# Altium PCB pulse_oximeter.PcbDoc
Units mm, origin at the board's own origin, x right, y up, seen from the top; angles counter-clockwise.
Board outline 15.4 x 10.4 mm, 2 copper layers (Top Layer, Bottom Layer); 37 components, 39 nets, 156 pads, 0 vias.
Unrouted connection lines stored in the file: 77.
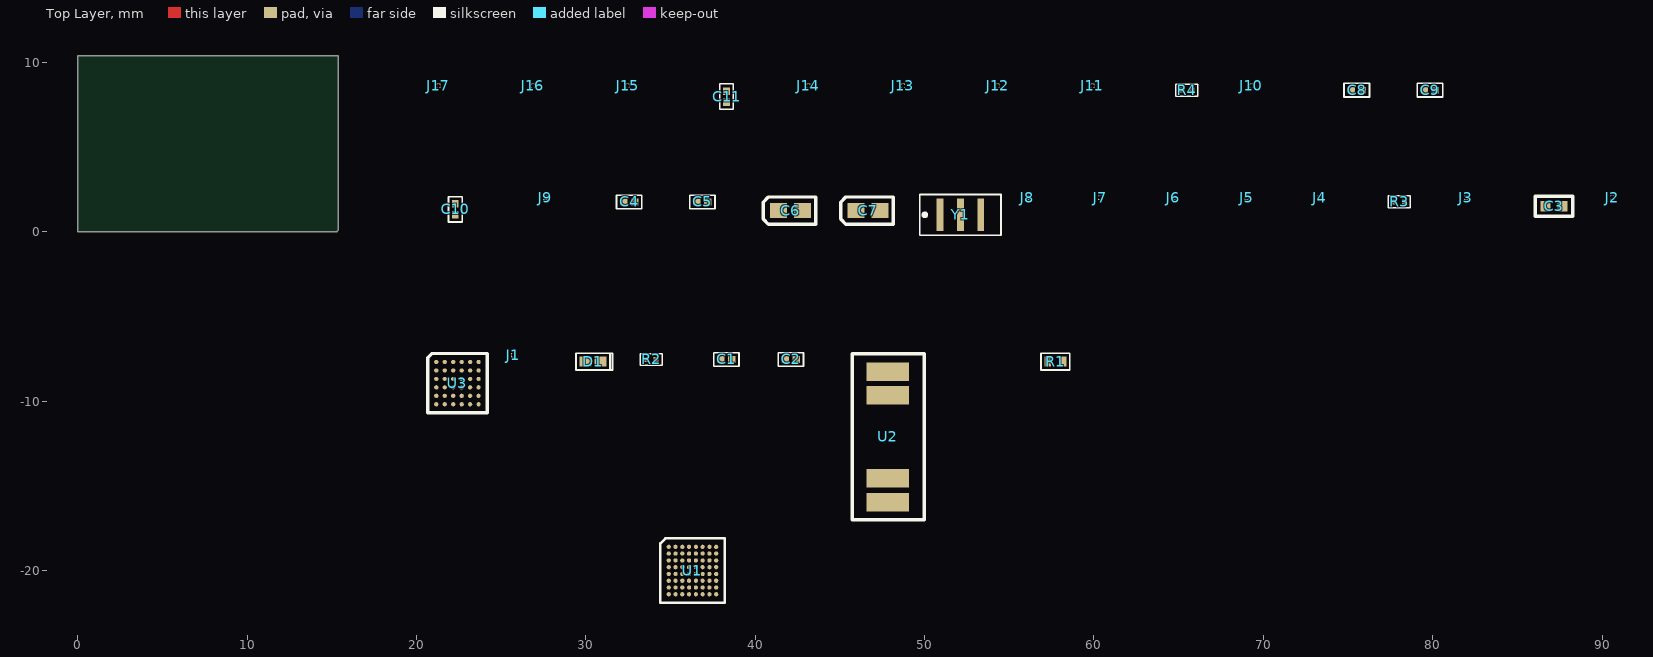
[diagram p0: Top Layer view]
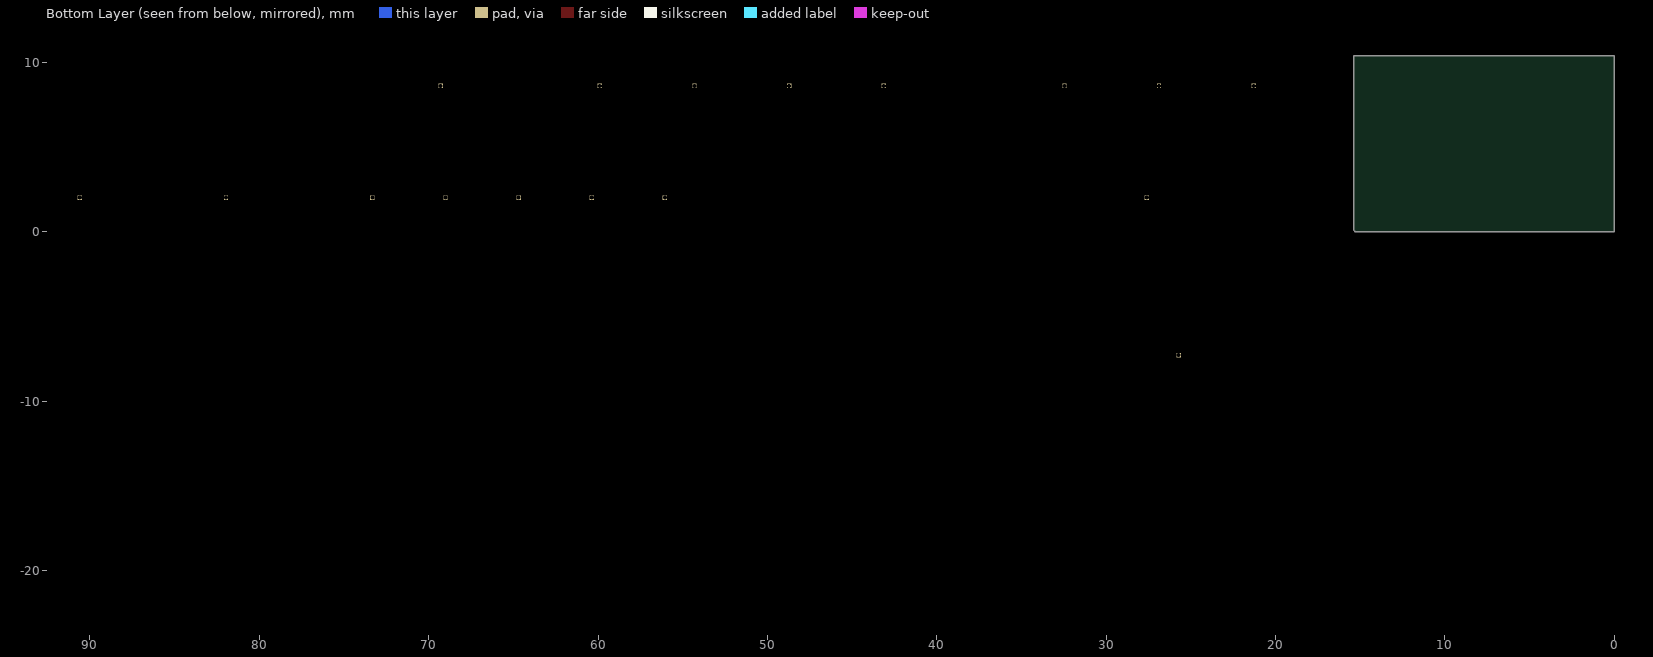
[diagram p1: Bottom Layer view, seen from below]

## Layer stack, top to bottom
Top Solder: solder mask 0.0102, Solder Resist, Dk 3.5
Top Layer: signal copper 0.0356
Dielectric 1: dielectric 0.32, FR-4, Dk 4.8
Bottom Layer: signal copper 0.0356
Bottom Solder: solder mask 0.0102, Solder Resist, Dk 3.5

## Board outline
0,0 15.3,0 15.4,0.1 15.4,10.4 0,10.4 0,10.3 0,10.2

## Design rules (kind name [scope] priority, off if disabled: settings)
Clearance [All] p1: gap=0.254 ignorepadtopadclearanceinfootprint=FALSE except(0: Arc-Hole Track-Hole SMDPad-Hole THPad-Hole Via-Hole Fill-Hole Poly-Hole Region-Hole Text-Hole)
PolygonConnect [All] p1: connectstyle=Relief reliefconductorwidth=0.254 reliefentries=4 polygonreliefangle="90 Angle" airgapwidth=0.254
RoutingVias [All] p1: holewidth=0.711 width=1.27 viastyle="Through Hole" minholewidth=0.711 minwidth=1.27 maxholewidth=0.711 maxwidth=1.27
SolderMaskExpansion [All] p1: expansion=0.102
Width [All] p1: maxlimit=0.254 minlimit=0.254 preferedwidth=0.254
30 further rules are at their usual default settings.

## Components (designator, comment, footprint, x,y, rotation, side; value= is the part's Value field where it differs from the comment)
C1 "0.1UF" C0201 38.299,-7.536 r0 top
C2 "0.1UF" C0201 42.109,-7.536 r0 top
C3 "0.47uF /16V" C0402 86.664,1.51 r0 top
C4 "0.1UF" C0201 32.562,1.764 r0 top
C5 "0.1UF" C0201 36.88,1.764 r0 top
C6 "2.2uF" C0603 42.087,1.256 r0 top
C7 "33uF" C0603 46.659,1.256 r0 top
C8 "0.1UF" C0201 75.52,8.364 r0 top
C9 "0.1UF" C0201 79.838,8.364 r0 top
C10 "0.1UF" C0201 22.3,1.325 r90 top
C11 "2200pF" C0201 38.309,7.983 r90 top
D1 "GREEN LED" D0402 30.425,-7.663 r0 top
J1 "Connector Pad" "CONECTOR PAD" 25.726,-7.282 r0 top
J2 "Connector Pad" "CONECTOR PAD" 90.601,2.018 r90 top
J3 "Connector Pad" "CONECTOR PAD" 81.965,2.018 r90 top
J4 "Connector Pad" "CONECTOR PAD" 73.329,2.018 r90 top
J5 "Connector Pad" "CONECTOR PAD" 69.011,2.018 r90 top
J6 "Connector Pad" "CONECTOR PAD" 64.693,2.018 r90 top
J7 "Connector Pad" "CONECTOR PAD" 60.375,2.018 r90 top
J8 "Connector Pad" "CONECTOR PAD" 56.057,2.018 r90 top
J9 "Connector Pad" "CONECTOR PAD" 27.609,2.018 r90 top
J10 "Connector Pad" "CONECTOR PAD" 69.297,8.618 r90 top
J11 "Connector Pad" "CONECTOR PAD" 59.899,8.618 r90 top
J12 "Connector Pad" "CONECTOR PAD" 54.311,8.618 r90 top
J13 "Connector Pad" "CONECTOR PAD" 48.723,8.618 r90 top
J14 "Connector Pad" "CONECTOR PAD" 43.135,8.618 r90 top
J15 "Connector Pad" "CONECTOR PAD" 32.467,8.618 r90 top
J16 "Connector Pad" "CONECTOR PAD" 26.879,8.618 r90 top
J17 "Connector Pad" "CONECTOR PAD" 21.291,8.618 r90 top
R1 "1M" R0402 57.73,-7.663 r0 top
R2 "0" R0201 33.854,-7.536 r0 top
R3 "3.3K" R0201 78.028,1.764 r0 top
R4 "47K" R0201 65.487,8.364 r0 top
U1 "MSP430F5528IYFFR" BGA64x8 36.3,-20 r0 top
U2 "DCM03" DCMO3 47.824,-12.108 r90 top
U3 "AFE4403YZPR" BGA36x6 22.424,-8.933 r0 top
Y1 "16 MHz" RESONATOR 52.12,1.002 r0 top

## Footprints (in the part's own frame and the unit in brackets; to place one, negate y for a bottom-side part, rotate by r counter-clockwise, add the part's x,y. Pads: shape width x height; smd on the part's side, far side on the other; paste and mask are expansions set on the pad)
BGA36x6 [mm]
  round 0.25 smd: A1(-1.25,1.25) A2(-0.75,1.25) A3(-0.25,1.25) A4(0.25,1.25) A5(0.75,1.25) A6(1.25,1.25) B1(-1.25,0.75) B2(-0.75,0.75) B3(-0.25,0.75) B4(0.25,0.75) B5(0.75,0.75) B6(1.25,0.75) C1(-1.25,0.25) C2(-0.75,0.25) C3(-0.25,0.25) C4(0.25,0.25) C5(0.75,0.25) C6(1.25,0.25) D1(-1.25,-0.25) D2(-0.75,-0.25) D3(-0.25,-0.25) D4(0.25,-0.25) D5(0.75,-0.25) D6(1.25,-0.25) E1(-1.25,-0.75) E2(-0.75,-0.75) E3(-0.25,-0.75) E4(0.25,-0.75) E5(0.75,-0.75) E6(1.25,-0.75) F1(-1.25,-1.25) F2(-0.75,-1.25) F3(-0.25,-1.25) F4(0.25,-1.25) F5(0.75,-1.25) F6(1.25,-1.25)
  silkscreen extent -1.75,-1.75 1.75,1.75, body extent -1.52,-1.52 1.52,1.52, height 0.5
BGA64x8 [mm]
  round 0.25 smd: A1(-1.4,1.4) A2(-1,1.4) A3(-0.6,1.4) A4(-0.2,1.4) A5(0.2,1.4) A6(0.6,1.4) A7(1,1.4) A8(1.4,1.4) B1(-1.4,1) B2(-1,1) B3(-0.6,1) B4(-0.2,1) B5(0.2,1) B6(0.6,1) B7(1,1) B8(1.4,1) C1(-1.4,0.6) C2(-1,0.6) C3(-0.6,0.6) C4(-0.2,0.6) C5(0.2,0.6) C6(0.6,0.6) C7(1,0.6) C8(1.4,0.6) D1(-1.4,0.2) D2(-1,0.2) D3(-0.6,0.2) D4(-0.2,0.2) D5(0.2,0.2) D6(0.6,0.2) D7(1,0.2) D8(1.4,0.2) E1(-1.4,-0.2) E2(-1,-0.2) E3(-0.6,-0.2) E4(-0.2,-0.2) E5(0.2,-0.2) E6(0.6,-0.2) E7(1,-0.2) E8(1.4,-0.2) F1(-1.4,-0.6) F2(-1,-0.6) F3(-0.6,-0.6) F4(-0.2,-0.6) F5(0.2,-0.6) F6(0.6,-0.6) F7(1,-0.6) F8(1.4,-0.6) G1(-1.4,-1) G2(-1,-1) G3(-0.6,-1) G4(-0.2,-1) G5(0.2,-1) G6(0.6,-1) G7(1,-1) G8(1.4,-1) H1(-1.4,-1.4) H2(-1,-1.4) H3(-0.6,-1.4) H4(-0.2,-1.4) H5(0.2,-1.4) H6(0.6,-1.4) H7(1,-1.4) H8(1.4,-1.4)
  silkscreen extent -1.9,-1.9 1.9,1.9, body extent -1.88,-1.88 1.88,1.88, height 0.63
C0201 [mm]
  rect 0.45x0.4 smd: 1(-0.325,0) 2(0.325,0)
  silkscreen extent -0.75,-0.4 0.75,0.4, body extent -0.3,-0.15 0.3,0.15, height 0.34
C0402 [mm]
  rect 0.6x0.6 smd: 1(0,0) 2(1,0)
  silkscreen extent -0.6,-0.6 1.6,0.6, body extent 0,-0.28 1,0.28, height 0.51
C0603 [mm]
  rect 1x0.9 smd: 1(-0.7,0) 2(0.7,0)
  silkscreen extent -1.6,-0.8 1.5,0.8, body extent -0.8,-0.42 0.8,0.43, height 0.91
"CONECTOR PAD" [mil]
  rect 10x10 hole 9.69: 1(0,0)
D0402 [mm]
  rect 0.7x0.6 smd: 1(0.45,0) 2(-0.45,0)
  silkscreen extent -1,-0.5 1.15,0.5, body extent -0.5,-0.3 0.5,0.3, height 0.2
DCMO3 [mm]
  rect 1.1x2.5 smd: 1(-3.85,0) 2(-2.45,0) 3(2.45,0) 4(3.85,0)
  silkscreen extent -4.9,-2.15 4.9,2.1
R0201 [mm]
  rect 0.3x0.3 smd: 1(-0.3,0) 2(0.3,0)
  silkscreen extent -0.65,-0.35 0.65,0.35, body extent -0.3,-0.15 0.3,0.15, height 0.24
R0402 [mm]
  rect 0.4x0.6 smd: 1(-0.45,0) 2(0.45,0)
  silkscreen extent -0.85,-0.5 0.85,0.5, body extent -0.5,-0.25 0.5,0.25, height 0.36
RESONATOR [mm]
  rect 0.4x1.9 smd: 1(-1.2,0) 2(0,0) 3(1.2,0)
  silkscreen extent -2.4,-1.2 2.4,1.2, body extent -2.25,-1 2.25,1, height 1.2

## Part data
C1 C2 C4 C5 C8 C9 C10: library part CL03A104KP3NNNC, "CAP CER 0.1UF 10V X5R 0201", Capacitance=100nF, Case/Package=0201, Case Code (Metric)=0603, Dielectric=X5R, Manufacturer 1=Samsung, Max Operating Temperature=85°C, Min Operating Temperature=-55°C, Package Quantity=1, Supplier Part Number 1=1276-1115-1-ND, Tolerance=10%, Voltage Rating=10V, Case Code (Imperial)=0201, Category=Capacitors, ComponentLink1Description=https://datasheet.ciiva.com/26838/getdatasheetpartid-357484-26838083.pdf?src-supplier=Verical, ComponentLink1URL=https://datasheet.ciiva.com/26838/getdatasheetpartid-357484-26838083.pdf?src-supplier=Verical, ComponentLink2Description=https://datasheet.ciiva.com/25803/cl03a104kp3nnnc-25803204.pdf?src-supplier=Digi-Key, ComponentLink2URL=https://datasheet.ciiva.com/25803/cl03a104kp3nnnc-25803204.pdf?src-supplier=Digi-Key, Contact Plating=Tin, Depth=0.3mm, Description 1="CAP CER 0.1UF 10V X5R 0201", Height=0.3mm, Lead Free="Lead Free", Length=0.6mm, Manufacturer Part Number 1=CL03A104KP3NNNC, Mount="Surface Mount", Packaging="Tape and Reel", Pricing 1="1=0.10000, 10=0.03100, 50=0.01660, 100=0.01360, 500=0.00974, 1000=0.00765, 2500=0.00696, 5000=0.00640 (USD)", Radiation Hardening=No, RoHS=Yes, Stock 1=7104377, Supplier 1=Digi-Key, Thickness=0.013inch, Voltage Rating (DC)=10V, Width=0.012inch
C3: library part C1005X7S1C474K050BC, "CAP CER 0.47UF 16V X7S 0402", Capacitance=470nF, Case/Package=0402, Case Code (Metric)=1005, Manufacturer 1=TDK, Max Operating Temperature=125°C, Min Operating Temperature=-55°C, Supplier Part Number 1=445-174768-1-ND, Tolerance=10%, Voltage Rating=16V, Case Code (Imperial)=0402, Category="Ceramic Capacitors", ComponentLink1Description=https://product.tdk.com/info/en/catalog/spec/mlccspec_commercial_general_midvoltage_en.pdf?src-supplier=Digi-Key, ComponentLink1URL=https://product.tdk.com/info/en/catalog/spec/mlccspec_commercial_general_midvoltage_en.pdf?src-supplier=Digi-Key, ComponentLink2Description=https://product.tdk.com/info/en/catalog/datasheets/mlcc_commercial_general_en.pdf?src-supplier=Digi-Key, ComponentLink2URL=https://product.tdk.com/info/en/catalog/datasheets/mlcc_commercial_general_en.pdf?src-supplier=Digi-Key, Manufacturer Part Number 1=C1005X7S1C474K050BC, Mount="Surface Mount", Packaging="Cut Tape", Pricing 1="1=0.27000, 10=0.18200, 50=0.10880, 100=0.09200, 500=0.06292, 1000=0.05566, 2500=0.05324, 5000=0.04840 (USD)", RoHS=Yes, RoHS Compliant=Yes, Stock 1=4274, Supplier 1=Digi-Key
C6: library part TCM1A225M8R, "Cap Tant Solid 2.2uF 10V M CASE 20% (1.6 X 0.85 X 0.8mm) Inward L SMD 1608-08 125C T/R", Case/Package=0603, Case Code (Metric)=1608, Manufacturer 1=Rohm, Max Operating Temperature=125°C, Min Operating Temperature=-55°C, Package Quantity=4000, Supplier Part Number 1=511-1495-1-ND, Tolerance=20%, Voltage Rating=10V, Capacitance=2.2uF, Case Code (Imperial)=0603, Category="Tantalum Capacitors", ComponentLink1Description=https://datasheet.ciiva.com/258/tc-m-258332.pdf?src-supplier=Digi-Key, ComponentLink1URL=https://datasheet.ciiva.com/258/tc-m-258332.pdf?src-supplier=Digi-Key, ComponentLink2Description=https://datasheet.ciiva.com/258/tc-m-258333.pdf?src-supplier=Digi-Key, ComponentLink2URL=https://datasheet.ciiva.com/258/tc-m-258333.pdf?src-supplier=Digi-Key, ComponentLink3Description=https://datasheet.ciiva.com/258/tc-m-258334.pdf?src-supplier=Digi-Key, ComponentLink3URL=https://datasheet.ciiva.com/258/tc-m-258334.pdf?src-supplier=Digi-Key, ComponentLink4Description=https://datasheet.ciiva.com/16493/tc-m-16493454.pdf?src-supplier=Future+Electronics, ComponentLink4URL=https://datasheet.ciiva.com/16493/tc-m-16493454.pdf?src-supplier=Future+Electronics, Construction=Flat, Depth=0.85mm, Features="General Purpose", Height=0.8mm, Height - Seated (Max)=0.035inch, Lead Free="Lead Free", Length=0.063inch, Manufacturer Part Number 1=TCM1A225M8R, Mount="Surface Mount", Packaging="Tape and Reel", Pricing 1="1=0.79000, 10=0.58400, 50=0.46680, 100=0.40020, 500=0.31682, 1000=0.26680 (USD)", RoHS=Yes, RoHS Compliant=Yes, Series=TC, Stock 1=15625, Supplier 1=Digi-Key, Voltage Rating (DC)=10V, Width=0.033inch
C7: library part TR8M336M6R3C1500, "CAP TANT 33UF 6.3V 20% 0603", Case/Package=0603, Case Code (Metric)=1608, ESR (Equivalent Series Resistance)=1.5R, Leakage Current=4.2uA, Manufacturer 1="Vishay Sprague", Max Operating Temperature=125°C, Min Operating Temperature=-55°C, Package Quantity=1, Ripple Current=129mA, Supplier Part Number 1=718-1672-1-ND, Tolerance=20%, Voltage Rating=6.3V, Capacitance=33uF, Case Code (Imperial)=0603, Category="Tantalum Capacitors", ComponentLink1Description=https://datasheet.ciiva.com/260/tr8-260774.pdf?src-supplier=Digi-Key, ComponentLink1URL=https://datasheet.ciiva.com/260/tr8-260774.pdf?src-supplier=Digi-Key, ComponentLink2Description=https://datasheet.ciiva.com/260/tr8-260775.pdf?src-supplier=Digi-Key, ComponentLink2URL=https://datasheet.ciiva.com/260/tr8-260775.pdf?src-supplier=Digi-Key, ComponentLink3Description=https://datasheet.ciiva.com/260/tr8-260776.pdf?src-supplier=Digi-Key, ComponentLink3URL=https://datasheet.ciiva.com/260/tr8-260776.pdf?src-supplier=Digi-Key, Dissipation Factor=30%, Features="General Purpose", Height=0.6mm, Height - Seated (Max)=0.035inch, Lead Free="Lead Free", Length=0.063inch, Manufacturer Part Number 1=TR8M336M6R3C1500, Mount="Surface Mount,PCB", Packaging="Tape and Reel", Pricing 1="1=2.26000, 10=1.82800, 50=1.59520, 100=1.39590, 500=1.06352, 1000=0.93058 (USD)", RoHS=Yes, RoHS Compliant=Yes, Series="MICROTAN® TR8", Stock 1=9416, Supplier 1=Digi-Key, Termination=SMD/SMT, Voltage Rating (DC)=6.3V, Weight=7.1E-05oz, Width=0.033inch
C11: library part GRM033R61A222KA01D, "Cap Ceramic 0.0022uF 10V X5R 10% SMD 0201 85C T/R", Capacitance=2.2nF, Case/Package=0201, Case Code (Metric)=0603, Dielectric=X5R, Manufacturer 1=Murata, Max Operating Temperature=85°C, Min Operating Temperature=-55°C, Package Quantity=1, Supplier Part Number 1=490-3162-1-ND, Tolerance=10%, Voltage Rating=10V, Case Code (Imperial)=0201, Category="Ceramic Capacitors", ComponentLink1Description=https://datasheet.ciiva.com/130/grm033r61a222ka01-01-130153.pdf?src-supplier=Digi-Key, ComponentLink1URL=https://datasheet.ciiva.com/130/grm033r61a222ka01-01-130153.pdf?src-supplier=Digi-Key, ComponentLink2Description=https://datasheet.ciiva.com/130/grm033r61a222ka01-01-130152.pdf?src-supplier=Digi-Key, ComponentLink2URL=https://datasheet.ciiva.com/130/grm033r61a222ka01-01-130152.pdf?src-supplier=Digi-Key, ComponentLink3Description=https://datasheet.ciiva.com/130/grm033r61a222ka01-01-130154.pdf?src-supplier=Digi-Key, ComponentLink3URL=https://datasheet.ciiva.com/130/grm033r61a222ka01-01-130154.pdf?src-supplier=Digi-Key, ComponentLink4Description=https://datasheet.ciiva.com/5420/product-5420355.pdf?src-supplier=Mouser, ComponentLink4URL=https://datasheet.ciiva.com/5420/product-5420355.pdf?src-supplier=Mouser, ComponentLink5Description=https://datasheet.ciiva.com/18184/getdatasheetpartid-320599-18184055.pdf?src-supplier=Verical, ComponentLink5URL=https://datasheet.ciiva.com/18184/getdatasheetpartid-320599-18184055.pdf?src-supplier=Verical, ComponentLink6Description=https://datasheet.ciiva.com/6031/482872-6031766.pdf?src-supplier=Farnell, ComponentLink6URL=https://datasheet.ciiva.com/6031/482872-6031766.pdf?src-supplier=Farnell, ComponentLink7Description=https://datasheet.ciiva.com/6031/482872-6031768.pdf?src-supplier=Farnell, ComponentLink7URL=https://datasheet.ciiva.com/6031/482872-6031768.pdf?src-supplier=Farnell, ComponentLink8Description=https://datasheet.ciiva.com/2989/product-2989275.pdf?src-supplier=Avnet, ComponentLink8URL=https://datasheet.ciiva.com/2989/product-2989275.pdf?src-supplier=Avnet, ComponentLink9Description=https://datasheet.ciiva.com/16467/product-16467343.pdf?src-supplier=Future+Electronics, ComponentLink9URL=https://datasheet.ciiva.com/16467/product-16467343.pdf?src-supplier=Future+Electronics, Depth=0.3mm, Height=0.3mm, Lead Free="Lead Free", Length=0.6mm, Manufacturer Part Number 1=GRM033R61A222KA01D, Mount="Surface Mount", Number of Pins=2, Packaging="Tape and Reel", Pricing 1="1=0.10000, 10=0.02200, 50=0.01180, 100=0.00960, 500=0.00684, 1000=0.00538, 2500=0.00489, 5000=0.00450 (USD)", Radiation Hardening=No, REACH SVHC="No SVHC", RoHS=Yes, RoHS Compliant=Yes, Stock 1=295526, Supplier 1=Digi-Key, Termination=SMD/SMT, Thickness=0.013inch, Voltage Rating (DC)=10V, Width=0.012inch
D1: library part APHHS1005CGCK, "LED GREEN CLEAR 0402 SMD", Case/Package=0402, Case Code (Metric)=1005, Color=Green, Forward Current=20mA, Forward Voltage=2.1V, Lens Color=Clear, Manufacturer 1=Kingbright, Max Operating Temperature=85°C, Min Operating Temperature=-40°C, Package Quantity=2000, Supplier Part Number 1=754-1101-1-ND, Case Code (Imperial)=0402, Category="LED Indication - Discrete", ComponentLink1Description=https://datasheet.ciiva.com/2113/aphhs1005cgck-2113972.pdf?src-supplier=Digi-Key, ComponentLink1URL=https://datasheet.ciiva.com/2113/aphhs1005cgck-2113972.pdf?src-supplier=Digi-Key, ComponentLink2Description=https://datasheet.ciiva.com/4688/aphhs1005cgck-38896-4688761.pdf?src-supplier=Mouser, ComponentLink2URL=https://datasheet.ciiva.com/4688/aphhs1005cgck-38896-4688761.pdf?src-supplier=Mouser, ComponentLink3Description=https://datasheet.ciiva.com/2113/aphhs1005cgck-2113973.pdf?src-supplier=Digi-Key, ComponentLink3URL=https://datasheet.ciiva.com/2113/aphhs1005cgck-2113973.pdf?src-supplier=Digi-Key, ComponentLink4Description=https://datasheet.ciiva.com/2113/aphhs1005cgck-2113974.pdf?src-supplier=Digi-Key, ComponentLink4URL=https://datasheet.ciiva.com/2113/aphhs1005cgck-2113974.pdf?src-supplier=Digi-Key, Dominant Wavelength=570nm, Height=0.6mm, Illumination Color=Green, Lead Free="Lead Free", Length=1mm, Lens Style=Clear,Flat, Luminous Intensity=50mcd, Manufacturer Part Number 1=APHHS1005CGCK, Mount="Surface Mount", Number of LEDs=1, Number of Pins=2, Packaging="Tape and Reel", Pricing 1="1=0.39000, 10=0.25900, 100=0.17290, 500=0.11956, 1000=0.09964 (USD)", RoHS=Yes, RoHS Compliant=Yes, Series=APHHS, Stock 1=207707, Supplier 1=Digi-Key, Test Current=20mA, Viewing Angle=120°, Wavelength=570nm, Width=0.5mm
J1 J2 J3 J4 J5 J6 J7 J8 J9 J10 J11 J12 J13 J14 J15 J16 J17: "22pin SPO2 Module Connector / pads"
R1: library part CRCW04021M00JNEDC, "Res Thick Film 0402 1M Ohm 5% 0.063W(1/16W) ±200ppm/C Pad SMD T/R", Case/Package=0402, Case Code (Metric)=1005, Manufacturer 1=Vishay, Max Operating Temperature=155°C, Max Power Dissipation=63mW, Min Operating Temperature=-55°C, Resistance=1MR, Resistor Type="Thick Film", Supplier Part Number 1=541-4119-1-ND, Temperature Coefficient=200ppm/°C, Tolerance=5%, Case Code (Imperial)=0402, Category="Chip Resistor", ComponentLink1Description=http://www.vishay.com/docs/28773/crcwce3.pdf?src-supplier=Digi-Key, ComponentLink1URL=http://www.vishay.com/docs/28773/crcwce3.pdf?src-supplier=Digi-Key, Manufacturer Part Number 1=CRCW04021M00JNEDC, Number of Terminations=2, Packaging="Tape and Reel", Pricing 1="1=0.10000, 10=0.02300, 100=0.00950, 1000=0.00427, 2500=0.00370, 5000=0.00306 (USD)", RoHS=Yes, RoHS Compliant=Yes, Stock 1=137627, Supplier 1=Digi-Key
R2: library part ERJ-1GN0R00C, "RES SMD 0 OHM JUMPER 1/20W 0201", Case/Package=0201, Case Code (Metric)=0603, Manufacturer 1=Panasonic, Max Operating Temperature=125°C, Max Power Dissipation=50mW, Min Operating Temperature=-55°C, Package Quantity=15000, Resistance=0R, Resistor Type="Thick Film", Supplier Part Number 1=P15979CT-ND, Temperature Coefficient=600ppm/°C, Tolerance=1%, Voltage Rating=25V, Case Code (Imperial)=0201, Category="Chip Resistor", ComponentLink1Description=https://datasheet.ciiva.com/22730/1678796-22730749.pdf?src-supplier=Element14, ComponentLink1URL=https://datasheet.ciiva.com/22730/1678796-22730749.pdf?src-supplier=Element14, Construction=Rectangular, Contact Plating=Tin, Depth=0.3mm, Features="Automotive AEC-Q200", Height=0.23mm, Lead Free="Lead Free", Length=0.6mm, Manufacturer Part Number 1=ERJ-1GN0R00C, Military Standard=Not, Mount="Surface Mount", Number of Terminations=2, Packaging="Tape and Reel", Power Rating=50mW, Pricing 1="1=0.10000, 10=0.02500, 25=0.01800, 50=0.01360, 100=0.01000, 250=0.00764, 500=0.00612, 1000=0.00450, 5000=0.00323 (USD)", REACH SVHC=Unknown, RoHS=Yes, RoHS Compliant=Yes, Series=ERJ, Stock 1=168930, Supplier 1=Digi-Key, Voltage Rating (DC)=25V, Width=0.3mm
R3: library part RC0603F332CS, "RES SMD 3.3K OHM 1% 1/20W 0201", Case/Package=0201, Case Code (Metric)=0603, Manufacturer 1=Samsung, Max Operating Temperature=125°C, Max Power Dissipation=50mW, Min Operating Temperature=-55°C, Resistance=3.3kR, Resistor Type="Thick Film", Supplier Part Number 1=1276-3643-1-ND, Temperature Coefficient=250ppm/°C, Tolerance=1%, Voltage Rating (DC)=25V, Case Code (Imperial)=0201, Category="Chip Resistor", ComponentLink1Description=https://datasheet.ciiva.com/26130/chip-resistor-150112-1-26130999.pdf?src-supplier=Digi-Key, ComponentLink1URL=https://datasheet.ciiva.com/26130/chip-resistor-150112-1-26130999.pdf?src-supplier=Digi-Key, ComponentLink2Description=https://datasheet.ciiva.com/26130/chip-resistor-150112-1-26130986.pdf?src-supplier=Digi-Key, ComponentLink2URL=https://datasheet.ciiva.com/26130/chip-resistor-150112-1-26130986.pdf?src-supplier=Digi-Key, Contact Plating=Tin, Features="Moisture Resistant", Height=0.01inch, Lead Free="Lead Free", Length=0.024inch, Manufacturer Part Number 1=RC0603F332CS, Number of Terminations=2, Packaging="Tape and Reel", Pricing 1="1=0.10000, 10=0.07000, 100=0.02870, 1000=0.01288, 2500=0.01118, 5000=0.00923 (USD)", Radiation Hardening=No, RoHS=Yes, RoHS Compliant=Yes, Series=RC, Stock 1=16670, Supplier 1=Digi-Key, Width=0.012inch
R4: library part RC0603F473CS, "RES SMD 47K OHM 1% 1/20W 0201", Case/Package=0201, Case Code (Metric)=0603, Manufacturer 1=Samsung, Max Operating Temperature=125°C, Max Power Dissipation=50mW, Min Operating Temperature=-55°C, Resistance=47kR, Resistor Type="Thick Film", Supplier Part Number 1=1276-3701-1-ND, Temperature Coefficient=250ppm/°C, Tolerance=1%, Voltage Rating (DC)=25V, Case Code (Imperial)=0201, Category="Chip Resistor", ComponentLink1Description=https://datasheet.ciiva.com/26129/chip-resistor-150112-1-26129736.pdf?src-supplier=Digi-Key, ComponentLink1URL=https://datasheet.ciiva.com/26129/chip-resistor-150112-1-26129736.pdf?src-supplier=Digi-Key, ComponentLink2Description=https://datasheet.ciiva.com/26129/chip-resistor-150112-1-26129722.pdf?src-supplier=Digi-Key, ComponentLink2URL=https://datasheet.ciiva.com/26129/chip-resistor-150112-1-26129722.pdf?src-supplier=Digi-Key, ComponentLink3Description=https://datasheet.ciiva.com/26129/chip-resistor-150112-1-26129757.pdf?src-supplier=Digi-Key, ComponentLink3URL=https://datasheet.ciiva.com/26129/chip-resistor-150112-1-26129757.pdf?src-supplier=Digi-Key, Contact Plating=Tin, Features="Moisture Resistant", Height=0.01inch, Lead Free="Lead Free", Length=0.024inch, Manufacturer Part Number 1=RC0603F473CS, Number of Terminations=2, Packaging="Tape and Reel", Pricing 1="1=0.10000, 10=0.07000, 100=0.02870, 1000=0.01288, 2500=0.01118 (USD)", Radiation Hardening=No, RoHS=Yes, RoHS Compliant=Yes, Series=RC, Stock 1=3857, Supplier 1=Digi-Key, Width=0.012inch
U1: "MCU 16-bit MSP430 RISC 128KB Flash 2.5V/3.3V 64-Pin DSBGA T/R", Case/Package=BGA, Frequency=25MHz, Manufacturer 1="Texas Instruments", Max Operating Temperature=85°C, Max Supply Voltage=3.6V, Min Operating Temperature=-40°C, Min Supply Voltage=1.8V, Package Quantity=2500, Supplier Part Number 1=296-36675-1-ND, Category=Microcontrollers, ComponentLink1Description=https://datasheet.ciiva.com/1595/msp430f5528-1595689.pdf?src-supplier=Digi-Key, ComponentLink1URL=https://datasheet.ciiva.com/1595/msp430f5528-1595689.pdf?src-supplier=Digi-Key, Core Architecture=CPUXV2, Data Bus Width=16b, Interface=I2C,SPI,IrDA,UART,USART,LIN,SCI,USB, Lead Free="Lead Free", Manufacturer Part Number 1=MSP430F5528IYFFR, Max Frequency=25MHz, Memory Size=128KB, Memory Type=FLASH, Number of A/D Converters=16, Number of ADC Channels=16, Number of GPIO=47, Number of I/Os=47, Number of Pins=64, Number of Timers/Counters=4, Number of UART Channels=2, Oscillator Type=Internal, Packaging="Tape and Reel", Peripherals="Brown-out Detect/Reset,POR,PWM,WDT,DMA", Pricing 1="1=9.03000, 10=8.15800, 25=7.77840, 100=6.75400, 250=6.45048, 500=5.88132, 1000=5.53350 (USD)", Radiation Hardening=No, RAM Size=10KB, RoHS=Yes, RoHS Compliant=Yes, Series=MSP430F5xx, Stock 1=0, Supplier 1=Digi-Key, Watchdog Timer=Yes
U2: "Integrated Dual Emitter and / Photodetector", Manufacturer 1=APMKorea, Manufacturer Part Number 1=DCMO3
U3: "AFE Medical 1ADC 22-Bit 1.8V/3.3V/5V 36-Pin DSBGA T/R", Manufacturer 1="Texas Instruments", Max Input Voltage=3.6V, Max Operating Temperature=70°C, Min Operating Temperature=-20°C, Min Supply Voltage=2V, Operating Supply Voltage=3.3V, Supplier Part Number 1=296-46409-1-ND, Category="Integrated Circuits", ComponentLink1Description=http://components.arrow.com/part/dataview/66454193S898280N7713?src-supplier=Arrow+Electronics, ComponentLink1URL=http://components.arrow.com/part/dataview/66454193S898280N7713?src-supplier=Arrow+Electronics, ComponentLink2Description=http://www.ti.com/lit/gpn/afe4403?src-supplier=Mouser, ComponentLink2URL=http://www.ti.com/lit/gpn/afe4403?src-supplier=Mouser, ComponentLink3Description=http://www.ti.com/general/docs/suppproductinfo.tsp?distId=10&amp;gotoUrl=http%3A%2F%2Fwww.ti.com%2Flit%2Fgpn%2Fafe4403&src-supplier=Digi-Key, ComponentLink3URL=http://www.ti.com/general/docs/suppproductinfo.tsp?distId=10&amp;gotoUrl=http%3A%2F%2Fwww.ti.com%2Flit%2Fgpn%2Fafe4403&src-supplier=Digi-Key, ComponentLink4Description=http://www.ti.com/lit/ds/symlink/afe4403.pdf?src-supplier=Digi-Key, ComponentLink4URL=http://www.ti.com/lit/ds/symlink/afe4403.pdf?src-supplier=Digi-Key, ComponentLink5Description=http://www.ti.com/general/docs/lit/getliterature.tsp?genericPartNumber=AFE4403&&fileType=pdf&src-supplier=Avnet, ComponentLink5URL=http://www.ti.com/general/docs/lit/getliterature.tsp?genericPartNumber=AFE4403&&fileType=pdf&src-supplier=Avnet, ComponentLink6Description=http://www.ti.com/general/docs/lit/getliterature.tsp?genericPartNumber=AFE4403&amp;&amp;fileType=pdf&src-supplier=Avnet+Asia, ComponentLink6URL=http://www.ti.com/general/docs/lit/getliterature.tsp?genericPartNumber=AFE4403&amp;&amp;fileType=pdf&src-supplier=Avnet+Asia, Contact Plating=Copper,Tin,Silver, Interface=SPI, Lead Free="Lead Free", Manufacturer Part Number 1=AFE4403YZPR, Max Supply Voltage=3.6V, Mount="Surface Mount", Number of A/D Converters=1, Number of Bits=22, Number of Channels=1, Number of Inputs=1, Number of LEDs=3, Number of Pins=36, Packaging="Tape and Reel", Pricing 1="1=7.94000, 10=7.17000, 25=6.83640, 100=5.93590, 250=5.66908, 500=5.50550 (USD)", Resolution=22b, RoHS=Yes, RoHS Compliant=Yes, Sampling Rate=1.3KS/s, Stock 1=4068, Supplier 1=Digi-Key, Type="General Purpose"
Y1: library part CSTCE16M0V53-R0, "Ceramic Resonator 16MHz ±0.5% (Tol) ±0.3% (Stability) 15pF 40Ohm 3-Pin CSMD T/R", Capacitance=15pF, Case/Package=SMD/SMT, Frequency=16MHz, Frequency Stability=0.2%, Frequency Tolerance=0.5%, Manufacturer 1=Murata, Max Operating Temperature=80°C, Min Operating Temperature=-20°C, Package Quantity=3000, Resistor Type=Ceramic, Supplier Part Number 1=490-1198-1-ND, Category=Resonator, ComponentLink1Description=https://datasheet.ciiva.com/18183/getdatasheetpartid-152969-18183272.pdf?src-supplier=Verical, ComponentLink1URL=https://datasheet.ciiva.com/18183/getdatasheetpartid-152969-18183272.pdf?src-supplier=Verical, ComponentLink2Description=https://datasheet.ciiva.com/884/p16e-884477.pdf?src-supplier=Digi-Key, ComponentLink2URL=https://datasheet.ciiva.com/884/p16e-884477.pdf?src-supplier=Digi-Key, ComponentLink3Description=https://datasheet.ciiva.com/1361/1506176-1361293.pdf?src-supplier=Element14, ComponentLink3URL=https://datasheet.ciiva.com/1361/1506176-1361293.pdf?src-supplier=Element14, ComponentLink4Description=https://datasheet.ciiva.com/884/p16e-884478.pdf?src-supplier=Digi-Key, ComponentLink4URL=https://datasheet.ciiva.com/884/p16e-884478.pdf?src-supplier=Digi-Key, ComponentLink5Description=https://datasheet.ciiva.com/884/p16e-884479.pdf?src-supplier=Digi-Key, ComponentLink5URL=https://datasheet.ciiva.com/884/p16e-884479.pdf?src-supplier=Digi-Key, ComponentLink6Description=https://datasheet.ciiva.com/14132/ceralock-eng-bro-14132735.pdf?src-supplier=Distrelec, ComponentLink6URL=https://datasheet.ciiva.com/14132/ceralock-eng-bro-14132735.pdf?src-supplier=Distrelec, ComponentLink7Description=https://datasheet.ciiva.com/16216/l0430e-16216847.pdf?src-supplier=Future+Electronics, ComponentLink7URL=https://datasheet.ciiva.com/16216/l0430e-16216847.pdf?src-supplier=Future+Electronics, Contact Plating=Gold, Height=0.9mm, Impedance=40R, Lead Free="Lead Free", Length=3.2mm, Load Capacitance=15pF, Manufacturer Part Number 1=CSTCE16M0V53-R0, Number of Pins=3, Packaging="Tape and Reel", REACH SVHC="No SVHC", RoHS=Yes, RoHS Compliant=Yes, Self Resonant Frequency=16MHz, Series=CSTCE_V, Stock 1=0, Supplier 1=Digi-Key, Termination=SMD/SMT, Tolerance=0.5%, Weight=0.001023oz, Width=1.3mm

## Nets (pads, with @x,y where several pads share a name; then routed paths per layer and width w, separated by ;. In a path a pad name is that pad's centre, name@x,y a point inside that pad or via, vN(x,y) a via of type N, cw(c..) or ccw(c..) an arc to the next point about the centre after c; other vN are vias at no path point)
AFE_ADC_RDY: U1.F7 U3.D5
AFE_DIAG_END: U1.E8 U3.B4
AFE_PDNZ: U1.F8 U3.C3
AFE_RESETZ: U1.E6 U3.D4
AFE_SPI_CLK: U1.F5 U3.C6
AFE_SPI_SIMO: U1.H3 U3.C4
AFE_SPI_SOMI: U1.G3 U3.C5
AFE_SPI_STE: U1.F3 U3.D6
AFE_VCC: C4.2 J1.1 U3.E4 U3.E5 U3.F2
AFE_XIN: U1.E7 U3.F3
AFE_XOUT: U3.F4
BG: C2.2 U3.C2
DVCC: C8.2 C9.2 C10.2 J16.1 R4.2 U1.A3 U1.A7 U1.H5
EXT_SPI_CLK: J6.1 U1.F4
EXT_SPI_SIMO: J5.1 U1.H4
EXT_SPI_SOMI: J4.1 U1.G4
EXT_SPI_STE: J3.1 U1.E4
GND: C1.1 C2.1 C3.1 C4.1 C5.1 C6.2 C7.2 C8.1 C9.1 C10.1 C11.1 J2.1 J7.1 J17.1 R1.2 R2.2 R3.1 U1.A4 U1.A8 U1.D2 U1.H2 U1.H6 U3.B2 U3.D2 U3.E2 U3.F6 Y1.2
INN: U2.4 U3.F1
INP: U2.3 U3.E1
JTAG_RST: C11.2 J12.1 R4.1 U1.D5
JTAG_TCK: J14.1 U1.C2
JTAG_TDI: J13.1 U1.D4
JTAG_TDO: J10.1 U1.D3
JTAG_TEST: J15.1 U1.E3
JTAG_TMS: J11.1 U1.C1
LED1: D1.2 U1.B7
LED_DRV_GND: J8.1 U3.A3
LED_DRV_SUP: C5.2 C6.1 C7.1 J9.1 U3.A2 U3.A6
NetC3_2: C3.2 U1.B8
NetD1_1: D1.1 R3.2
NetR2_1: R2.1 U1.F2
PUR: R1.1 U1.G2
TX_REF: C1.2 U3.B1
TXN: U2.1 U3.A4
TXP: U2.2 U3.A5
VCM: U3.D1
XT2IN: U1.E1 Y1.1
XT2OUT: U1.D1 Y1.3
pads on no net: U1.A1 U1.A2 U1.A5 U1.A6 U1.B1 U1.B2 U1.B3 U1.B4 U1.B5 U1.B6 U1.C3 U1.C4 U1.C5 U1.C6 U1.C7 U1.C8 U1.D6 U1.D7 U1.D8 U1.E2 U1.E5 U1.F1 U1.F6 U1.G1 U1.G5 U1.G6 U1.G7 U1.G8 U1.H1 U1.H7 U1.H8 U3.A1 U3.B3 U3.B5 U3.B6 U3.C1 U3.D3 U3.E3 U3.E6 U3.F5